# Altium PCB DCDC_IBB_-12V_V01.PcbDoc
Units mil, origin at the board's own origin, x right, y up, seen from the top; angles counter-clockwise.
Board outline 2539.37 x 1535.83 mil, 2 copper layers (Top Layer, Bottom Layer), stack 61.855 mil thick; 31 components, 13 nets, 73 pads, 48 vias.
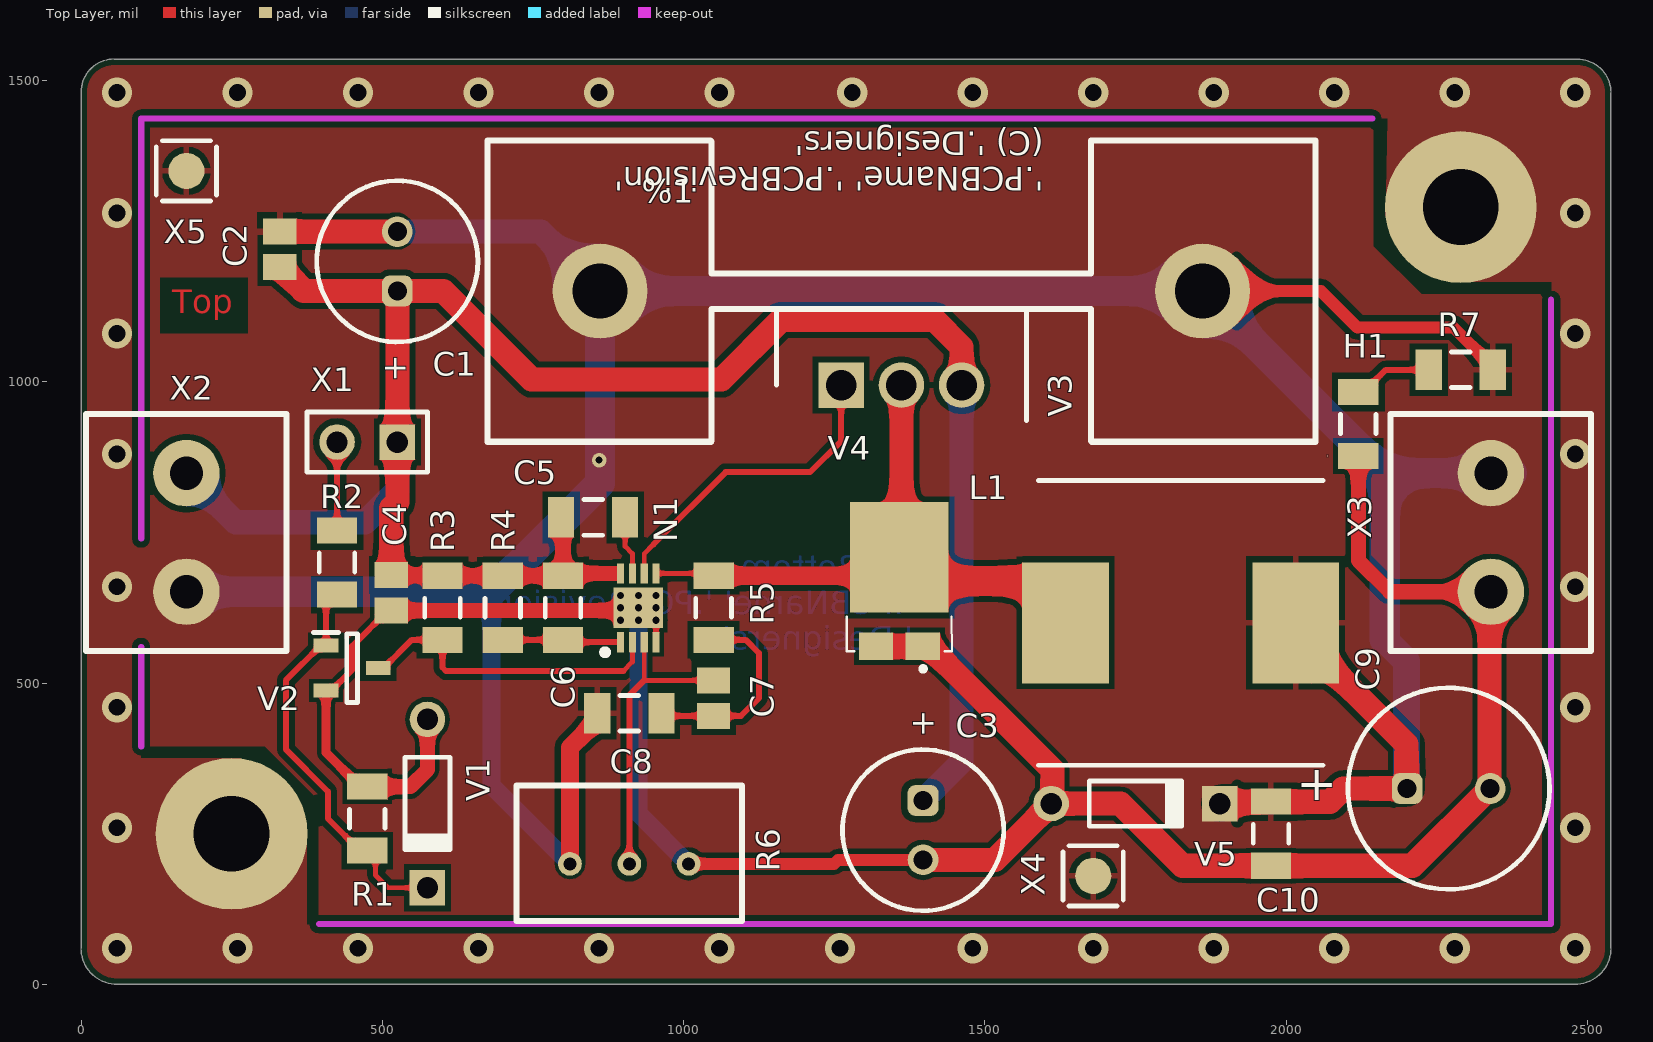
[diagram p0: Top Layer view]
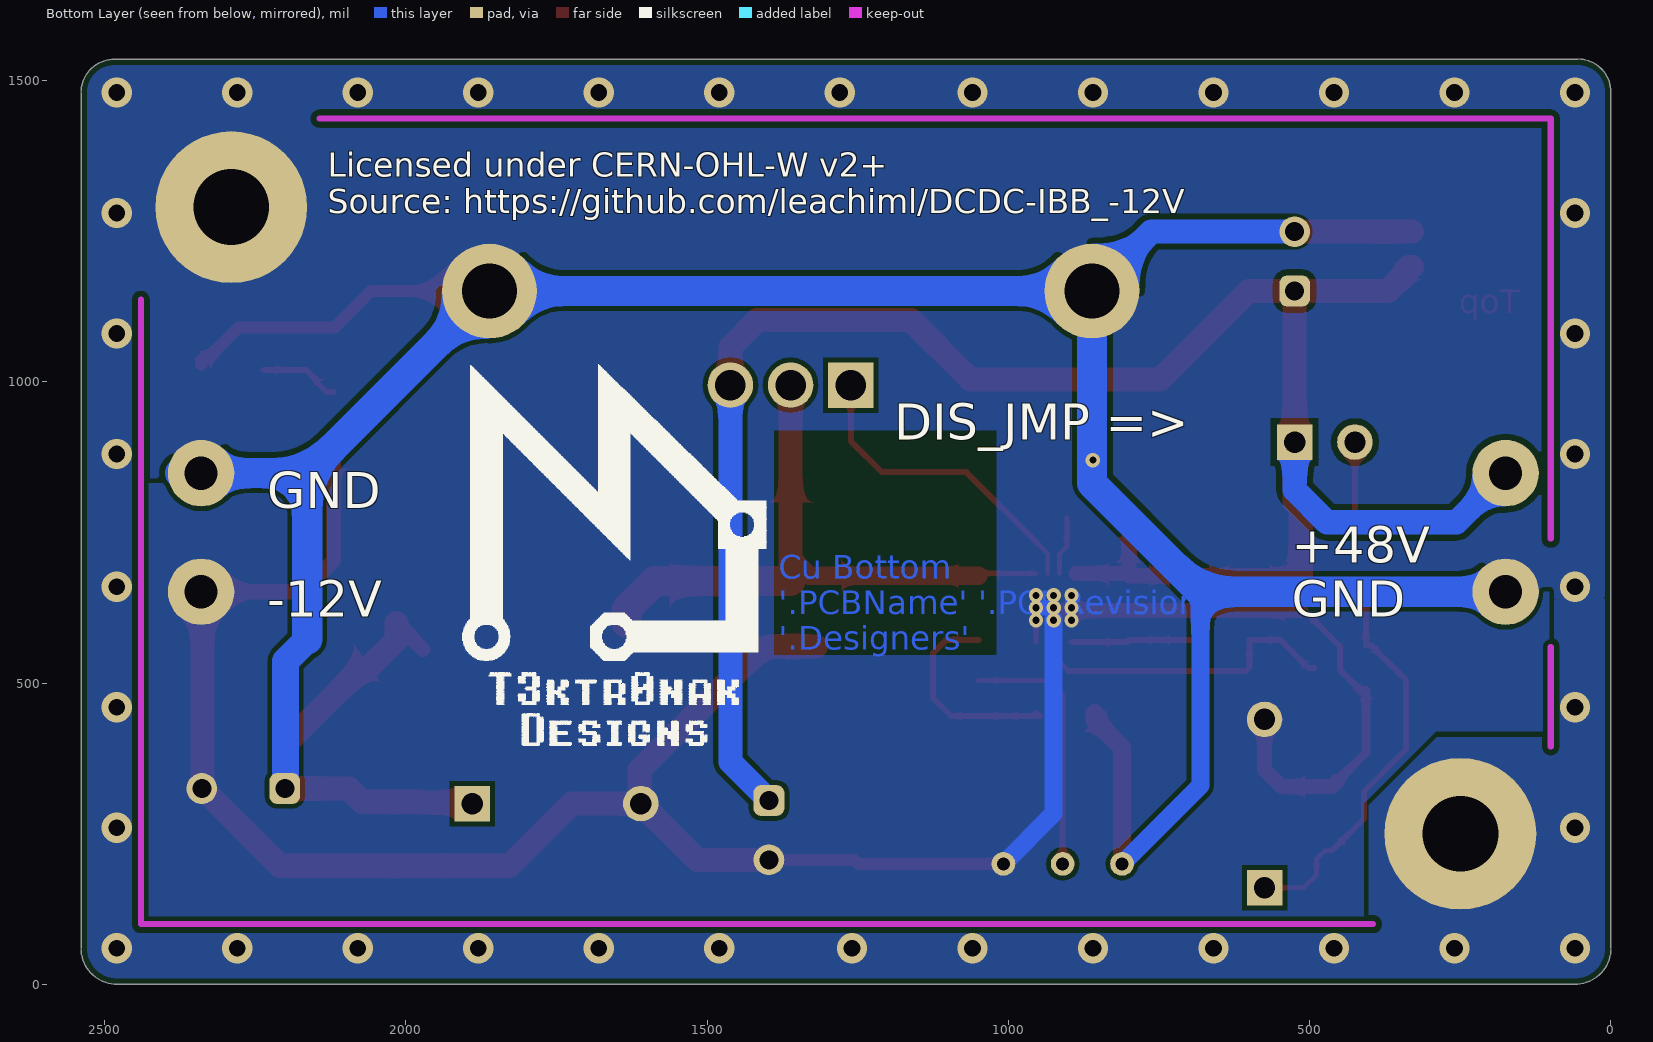
[diagram p1: Bottom Layer view, seen from below]

## Layer stack, top to bottom
Top Solder: solder mask 0.4, Solder Resist, Dk 3.5
Top Layer: signal copper 1.4
Dielectric 1: dielectric 59.0551, FR-4, Dk 4.8
Bottom Layer: signal copper 1.4
Bottom Solder: solder mask 0.4, Solder Resist, Dk 3.5

## Board outline
0,60 0,1481 0.17,1481 cw(c55,1481) 55,1535.83 55,1535.43 2483.94,1535.43 cw(c2483.94,1480) 2539.37,1480 2539.37,60 cw(c2479.37,60) 2479.37,0 60,0 cw(c60,60)

## Design rules (kind name [scope] priority, off if disabled: settings)
AcuteAngle [All] p1: minimum=4.40000000000000E+0001 checktracksonly=FALSE
BoardOutlineClearance [NOT(OnLayer('Top Overlay'))] p1: gap=10 ignorepadtopadclearanceinfootprint=FALSE
Clearance Clearance_-12V [(HasFootprint('SON50P300X300X80-9N') OR InNet('minus_12V'))] p1: gap=7.8 ignorepadtopadclearanceinfootprint=TRUE
Clearance [All] p2: gap=10 ignorepadtopadclearanceinfootprint=TRUE
HoleSize [All] p1: absolutevalues=TRUE maxlimit=248.03 minlimit=11.81 maxpercent=80.000 minpercent=20.000
HoleToHoleClearance HoleToHoleClearance_Thermal [HasFootprint('SON50P300X300X80-9N')] p1: gap=7 allowstackedmicrovias=TRUE
HoleToHoleClearance [All] p2: gap=10 allowstackedmicrovias=TRUE
MinimumAnnularRing [IsVia] p1: minimumring=5.9
MinimumSolderMaskSliver MinimumSolderMaskSliver_C1206 [(HasFootprint('C1206') OR HasFootprint('C0805') OR HasFootprint('1206_Marked'))] p1: minsoldermaskwidth=7
MinimumSolderMaskSliver MinimumSolderMaskSliver_N1 [HasFootprint('SON50P300X300X80-9N')] p2: minsoldermaskwidth=2.6
MinimumSolderMaskSliver MinimumSolderMaskSliver_Default [All] p3: minsoldermaskwidth=10
PlaneClearance [All] p1: clearance=59.06
PolygonConnect PolygonConnect_PowerNet [InNetClass('Power')] p1: thpad.connectstyle=Direct thpad.reliefconductorwidth=10 thpad.reliefentries=4 thpad.polygonreliefangle="90 Angle" thpad.airgapwidth=10 smdpad.connectstyle=Relief smdpad.reliefconductorwidth=10 smdpad.reliefentries=4 smdpad.polygonreliefangle="90 Angle" smdpad.airgapwidth=10 via.connectstyle=Direct via.reliefconductorwidth=10 via.reliefentries=4 via.polygonreliefangle="90 Angle" via.airgapwidth=10
PolygonConnect PolygonConnect_Default [All] p2: connectstyle=Relief reliefconductorwidth=10 reliefentries=4 polygonreliefangle="90 Angle" airgapwidth=10
RoomDefinition Topsheet [InComponentClass('Topsheet')] p1: confinementstyle=ConfineIn formatcopy=TRUE lockcomponents=FALSE outline 0,0 2540,0 2540,1534.8 0,1534.8
RoutingVias RoutingVias_Thermal [InNet('minus_12V')] p1: holewidth=39.37 width=70.87 viastyle="Through Hole" minholewidth=11.81 minwidth=23.62 maxholewidth=248.03 maxwidth=496.06
RoutingVias [All] p2: holewidth=28 width=50 viastyle="Through Hole" minholewidth=28 minwidth=50 maxholewidth=28 maxwidth=50
SilkToSolderMaskClearance [HasFootprint('SON50P300X300X80-9N')] p1: minsilkscreentomaskgap=9.7 clearancetoexposedcopper=TRUE
SilkToSolderMaskClearance SilkToSolderMaskClearance_Diode [HasFootprint('FSV1045V')] p2: minsilkscreentomaskgap=1 clearancetoexposedcopper=TRUE
SilkToSolderMaskClearance SilkToSolderMaskClearance_SOT [HasFootprint('SOT95P230X110-3N')] p3: minsilkscreentomaskgap=1 clearancetoexposedcopper=TRUE
SilkToSolderMaskClearance SilkToSolderMaskClearance_Default [IsPad] p4: minsilkscreentomaskgap=10 clearancetoexposedcopper=TRUE
SolderMaskExpansion [All] p1: expansion=4 istentingtop=FALSE
UnRoutedNet [All] p1: checkbadconnections=TRUE
Width Width_Power [InNetClass('Power')] p1: maxlimit=50 minlimit=5 preferedwidth=35 minimp=50.000000 maximp=50.000000 favimp=50.000000
Width Width_Default [All] p2: maxlimit=10 minlimit=8 preferedwidth=10 minimp=50.000000 maximp=50.000000 favimp=50.000000
24 further rules are at their usual default settings.

## Classes and differential pairs
net class Power: 48V GND minus_12V SW

## Components (designator, comment, footprint, x,y, rotation, side; value= is the part's Value field where it differs from the comment)
%1 "Kühlkörper für TO-220" "SK 104/25,4 STS" 1861.61,1150.59 r180 top
C1 "47uF" WCAP-ATG5_D6.3H11 525,1200 r270 top
C2 "0.1uF" C0805 330,1220 r270 top
C3 "47uF" WCAP-ATG5_D6.3H11 1397.64,255.91 r90 top
C4 "0.1uF" C0805 515,650 r90 top
C5 "470nF" C1206 850,775 r180 top
C6 "1000pF" C1206 800,625 r270 top
C7 "0.1uF" C0805 1050,475 r270 top
C8 "3300pF" C1206 910,450 r180 top
C9 "470uF" WCAP-ATG5_D8H11.5 2270,325 r180 top
C10 "1uF" C1206 1975,250 r90 top
H1 "LED Grün" 1206_Marked 2120,930 r90 top
L1 "100uH" INDPM120120X1020N 1825,600 r0 top
N1 "LM5085SD_NOPB" SON50P300X300X80-9N 925,625 r90 top
R1 "56k" C1206 475,275 r270 top
R2 "56k" C1206 425,700 r90 top
R3 "240k" C1206 600,625 r90 top
R4 "1.8k" C1206 700,625 r270 top
R5 "270k" C1206 1050,625 r90 top
R6 "10k" 64W-2,0M 910,200 r180 top
R7 "560" C1206 2290,1020 r0 top
V1 "1N751A" DO-35 575,300 r270 top
V2 "BSS123,215" SOT95P230X110-3N 450,525 r0 top
V3 "IRF9530N" TO254P469X1042X1967-3P 1261.61,994.59 r0 top
V4 "FSV12100V" FSV1045V 1358.27,708.66 r270 top
V5 "1N4148" DO-35 1750,300 r0 top
X1 "Stiftleiste 2-Pol" HDR1X2 525,900 r180 top
X2 "Lötbare Schraubklemme - 2-pol" "TERMINAL BLOCK 2POL RM5MM" 175,750 r270 top
X3 "Lötbare Schraubklemme - 2-pol" "TERMINAL BLOCK 2POL RM5MM" 2340,750 r90 top
X4 "FiducialSMD" PIN1RoundSMD 1680,180 r0 top locked
X5 "FiducialSMD" PIN1RoundSMD 175,1350 r0 top

## Footprints (in the part's own frame and the unit in brackets; to place one, negate y for a bottom-side part, rotate by r counter-clockwise, add the part's x,y. Pads: shape width x height; smd on the part's side, far side on the other; paste and mask are expansions set on the pad)
64W-2,0M [mm] "64W-2,0M Präzisionspotentiometer, 25 Gänge, stehend, 2,0 MOhm"
  round 1 hole 0.55: 1(-2.5,0) 2(0,0) 3(2.5,0)
  silkscreen extent -4.75,-3.3 4.75,2.4, body extent -4.75,-3.3 4.75,2.41, height 12
1206_Marked [mm] "Diode, Body 3.2x1.6mm, IPC High Density"
  rect 1.1x1.7 smd: 1(-1.35,0) 2(1.35,0)
  silkscreen extent -0.4,-0.75 0.4,0.75, body extent -1.7,-0.9 1.7,0.9, height 1.3
C0805 [mm] "Chip Capacitor, Body 2.0x1.3mm, IPC High Density"
  rect 1.1x1.4 smd: 1(-0.75,0) 2(0.75,0)
  body extent -1.1,-0.72 1.1,0.72, height 1.4
C1206 [mm] "Chip Capacitor, Body 3.2x1.6mm, IPC High Density"
  rect 1.1x1.7 smd: 1(-1.35,0) 2(1.35,0)
  silkscreen extent -0.4,-0.75 0.4,0.75, body extent -1.7,-0.9 1.7,0.9, height 1.3
DO-35 [mm] "Diode, Axial; Body 3.8 x 1.9 mm (LxDia. max), Lead Dia. 0.53 mm (max)"
  round 1.5 hole 0.9: 1(-3.55,0)
  rect 1.5x1.5 hole 0.9: 2(3.55,0)
  silkscreen extent -1.95,-0.95 2.05,0.95
FSV1045V [mm]
  rect 1.15x1.45 smd: 1(3.75,-0.985) 1(3.75,0.985)
  rect 4.65x4.15 smd: 3(0,0)
  silkscreen extent 2.5,-2.22 4.8,2.22, body extent -1.95,-2.22 4.21,2.22, height 1.3
HDR1X2 [mm] "Connector; Header; 2 Position"
  rect 1.5x1.5 hole 0.9: 1(0,0)
  round 1.5 hole 0.9: 2(2.54,0)
  silkscreen extent -1.27,-1.27 3.81,1.27
INDPM120120X1020N [mm]
  rect 3.65x5.1 smd: 1(-4.85,0) 2(4.85,0)
  silkscreen extent -6,-6 6,6, body extent -6.15,-6.15 6.15,6.15, height 10.16
PIN1RoundSMD [mil] "Connector; PlugRoundSMD"
  round 60 smd: 1(0,0)
  silkscreen extent -50,-50 50,50
"SK 104/25,4 STS" [mm] "Kühlkörper 14K/W TO-220"
  round 4 hole 2.32: 1(0,0) 1(25.4,0)
  silkscreen extent -4.75,-6.35 30.15,6.35, body extent -4.72,-6.32 30.17,6.38, height 25.4
SON50P300X300X80-9N [mm]
  rect 0.85x0.3 smd: 1(-1.45,0.75) 2(-1.45,0.25) 3(-1.45,-0.25) 4(-1.45,-0.75) 5(1.45,-0.75) 6(1.45,-0.25) 7(1.45,0.25) 8(1.45,0.75)
  rect 1.7x2.1 smd: 9(0,0)
  silkscreen extent -2,1.27 -1.75,1.52, body extent -1.55,-1.5 1.55,1.5, height 0.8
SOT95P230X110-3N [mm]
  rect 1.05x0.6 smd: 1(-1.1,0.95) 2(-1.1,-0.95) 3(1.1,0)
  silkscreen extent -1.63,-1.45 0.23,1.5, body extent -1.15,-1.45 1.15,1.45, height 1.1
"TERMINAL BLOCK 2POL RM5MM" [mm] "Terminal Block 2Pol RM5mm"
  round 2.8 hole 1.4: 1(-2.5,0) 2(2.5,0)
  silkscreen extent -5,-4.23 5,4.23, body extent -5,-4.03 5.55,4.13, height 9.99
TO254P469X1042X1967-3P [mm]
  rect 1.92x1.92 hole 1.28: 1(0,0)
  round 1.92 hole 1.28: 2(2.54,0) 3(5.08,0)
  silkscreen extent -2.73,-1.5 7.81,3.19, body extent -2.67,-1.5 7.75,3.19, height 18.84
WCAP-ATG5_D6.3H11 [mm] "Aluminum Electrolytic Capacitors, 6.3x11mm"
  rrect50% 1.3x1.3 hole 0.8: 1(1.25,0)
  round 1.3 hole 0.8: 2(-1.25,0)
  silkscreen extent -3.4,-3.4 3.4,3.4, body extent -3.14,-3.15 3.15,3.15, height 11.31
WCAP-ATG5_D8H11.5 [mm] "Aluminum Electrolytic Capacitors, 8x11.5mm"
  rrect50% 1.3x1.3 hole 0.8: 1(1.75,0)
  round 1.3 hole 0.8: 2(-1.75,0)
  silkscreen extent -4.25,-4.25 4.25,4.25, body extent -3.99,-4 4,4, height 11.81

## Part data
%1: library part Placeholder, "Mechanische Komponenten Platzhalter", Manufacturer="Fischer Elektronik", Bezeichnung="Kühlkörper für TO-220", Orderingcode="SK 104/25,4 STS"
C1 C3: library part 860020773013, "=Bezeichnung", Capacitance Tolerance=+/-20%, Leakage Current=29.61uA, Manufacturer="Wurth Elektronik", Operating Temperature="-40 to +105degC", Rated Voltage=63VDC, Ripple Current=125mA, Bezeichnung="WCAP-ATG5 Aluminum Electrolytic Capacitor, Radial, THT, D6.3xH11, 47uF, 63V", Capacitance=47uF, ComponentLink1Description=Manufacturer, ComponentLink1URL=http://www.we-online.de, ComponentLink2Description=Datasheet, ComponentLink2URL=https://www.we-online.com/catalog/datasheet/860020773013.pdf, Diameter=6.3mm, Dissipation Factor=9%, Endurance=2000h, Height=11mm, Mounting Technology=THT, Orderingcode=860020773013, Packaging="Ammo Pack", Published Date="October 2020", Technical Reference=ATDD110470M063DSPA4B000
C2 C4 C5 C6 C7 C8 C10: library part "Cap Semi", "Capacitor (Semiconductor SIM Model)", Manufacturer=KEMET, LatestRevisionDate=29-May-2009, LatestRevisionNote="IPC-7351 Footprint Added.", PackageDescription="Chip Capacitor", PackageReference=C1206, Published=8-Jun-2000, Publisher="Altium Limited"
  C2 C4 C7: Bezeichnung="Kerko 63V", Orderingcode=C0805C104KMREC7210
  C5: Bezeichnung="Kerko 16V", Orderingcode=C1206C474KMREC7210
  C6: Bezeichnung="Kerko 63V", Orderingcode=C1206C102KMRECTU
  C8: Bezeichnung="Kerko 63V", Orderingcode=C1206C332K1RAC7553
  C10: Bezeichnung="Kerko 63V", Orderingcode=C1206C105K5RACTU
C9: library part 860020374012, "=Bezeichnung", Capacitance Tolerance=+/-20%, Leakage Current=75.2uA, Manufacturer="Wurth Elektronik", Operating Temperature="-40 to +105degC", Rated Voltage=16VDC, Ripple Current=370mA, Bezeichnung="WCAP-ATG5 Aluminum Electrolytic Capacitor, Radial, THT, D8xH11.5, 470uF, 16V", Capacitance=470uF, ComponentLink1Description=Manufacturer, ComponentLink1URL=http://www.we-online.de, ComponentLink2Description=Datasheet, ComponentLink2URL=https://www.we-online.com/catalog/datasheet/860020374012.pdf, Diameter=8mm, Dissipation Factor=15%, Endurance=2000h, Height=11.5mm, Mounting Technology=THT, Orderingcode=860020374012, Packaging="Ammo Pack", Published Date="October 2020", Technical Reference=ATDE115471M016DSPA7B000
H1: library part "LED 5mm, 2.54mm Rastermaß, 0.5mm", "LED 5mm, 2.54mm Rastermaß, 0.5mm Beinchendurchmesser", Manufacturer="Stanley Electric", Bezeichnung="LED 20mA 1206 Grün", Orderingcode=RPG1102W-660-TR
L1: library part Inductor, "Inductor", Manufacturer=Coilcraft, Bezeichnung="Spule 100uH; 3.4A; MSS1210-104KED", Code_IEC=1005, Code_JEITA=0402, LatestRevisionDate=29-May-2009, LatestRevisionNote="IPC-7351 Footprint Added.", Orderingcode=MSS1210-104KED, PackageDescription="Chip Inductor", PackageReference=0402-A, Published=8-Jun-2000, Publisher="Altium Limited"
N1: "Integrated Circuit", Arrow Part Number=LM5085SD/NOPB, Manufacturer="Texas Instruments", Mouser Part Number=926-LM5085SD/NOPB, Arrow Price/Stock=https://www.arrow.com/en/products/lm5085sdnopb/texas-instruments, Datasheet Link=http://www.ti.com/lit/gpn/lm5085, Height=0.8mm, Mouser Price/Stock=https://www.mouser.co.uk/ProductDetail/Texas-Instruments/LM5085SD-NOPB?qs=QbsRYf82W3Ha5v5j3YN%2FqQ%3D%3D, Orderingcode=LM5085SD/NOPB
R1 R2 R3 R4 R5 R7: library part Res2, "Resistor", LatestRevisionDate=17-Jul-2002, LatestRevisionNote="Re-released for DXP Platform.", PackageDescription="Axial Device, Thru-Hole; 2 Leads; 0.4 in Pin Spacing", PackageReference=AXIAL-0.4, Published=8-Jun-2000, Publisher="Altium Limited"
R6: library part 64W-2,0M, "64W-10K Präzisionspotentiometer, 25 Gänge, stehend, 10k Ohm", Manufacturer=Suntan, Bezeichnung="64W-10K Präzisionspotentiometer, 25 Gänge, stehend, 10k Ohm"
V1: library part "Diode 1N4148", "=Bezeichnung", Bezeichnung="Zener Diode 5,1V", Code_JEDEC=DO-204-AH, ComponentLink1Description="Manufacturer Link", ComponentLink1URL=http://www.fairchildsemi.com/, ComponentLink2Description=Datasheet, ComponentLink2URL=http://www.fairchildsemi.com/ds/1N%2F1N4148.pdf, DatasheetVersion=1997, LatestRevisionDate=17-Jul-2002, LatestRevisionNote="Re-released for DXP Platform.", PackageDescription="Diode, Axial; Body 3.8 x 1.9 mm (LxDia. max), Lead Dia. 0.53 mm (max)", PackageReference=DO-35, Published=8-Jun-2000, Publisher="Altium Limited"
V2: "MOSFET (N-Channel)", Manufacturer=Nexperia, Mouser Part Number=771-BSS123-T/R, Arrow Part Number=BSS123,215, Arrow Price/Stock=https://www.arrow.com/en/products/bss123215/nexperia, Datasheet Link=https://componentsearchengine.com/Datasheets/2/BSS123,215.pdf, Height=1.1mm, Mouser Price/Stock=https://www.mouser.co.uk/ProductDetail/Nexperia/BSS123215?qs=me8TqzrmIYWQISbOHJHs9Q%3D%3D, Orderingcode=BSS123,215
V3: "MOSFET (P-Channel)", Manufacturer="International Rectifier", Bezeichnung="Mosfet P-Channel Enhancement 100V", Datasheet Link=https://www.infineon.com/dgdl/irf9530n.pdf?fileId=5546d462533600a401535611b4a71dbf, Height=4.69mm, Orderingcode=IRF9530N
V4: library part "Diode 10TQ035", "Schottky Rectifier", Bezeichnung="Shotky Diode", ComponentLink1Description="Manufacturer Link", ComponentLink1URL=http://www.irf.com/, ComponentLink2Description=Datasheet, ComponentLink2URL=http://www.irf.com/product-info/datasheets/data/10tq.pdf, DatasheetVersion=PD-2.057B, LatestRevisionDate=17-Jul-2002, LatestRevisionNote="Re-released for DXP Platform.", Note="Terminal 2 is the TAB and is electrically connected to the cathode", PackageDescription="TO, Thru-Hole, Vertical, Heatsink Mounted; 3 In-Line Leads (1 Absent); Pitch 2.54 mm", PackageReference=TO-220AC, PackageVersion=Feb-1998, Published=8-Jun-2000, Publisher="Altium Limited"
V5: library part "Diode 1N4148", "High Conductance Fast Diode", Bezeichnung="Kleinleistungs Diode", Code_JEDEC=DO-204-AH, ComponentLink1Description="Manufacturer Link", ComponentLink1URL=http://www.fairchildsemi.com/, ComponentLink2Description=Datasheet, ComponentLink2URL=http://www.fairchildsemi.com/ds/1N%2F1N4148.pdf, DatasheetVersion=1997, LatestRevisionDate=17-Jul-2002, LatestRevisionNote="Re-released for DXP Platform.", Orderingcode=1N4148, PackageDescription="Diode, Axial; Body 3.8 x 1.9 mm (LxDia. max), Lead Dia. 0.53 mm (max)", PackageReference=DO-35, Published=8-Jun-2000, Publisher="Altium Limited"
X1: library part "Header 2", "Header, 2-Pin", Bezeichnung="Stiftleiste RM2,54", LatestRevisionDate=17-Jul-2002, LatestRevisionNote="Re-released for DXP Platform.", Publisher="Altium Limited"
X2 X3: library part "Terminal-Block 2Pol. RM5mm", Manufacturer=RND, Bezeichnung="Lötbare Schraubklemme - 2-pol, RM 5 mm, 90°", Orderingcode="RND 205-00045"
X4 X5: library part PlugRoundSMD, "PlugRoundSMD", LatestRevisionDate=17-Jul-2002, LatestRevisionNote="Re-released for DXP Platform.", Publisher="Altium Limited"

## Free pads (board coordinates)
  round 251.97 hole 125.98: 1(250,250) 1(2290,1290)

## Via types
v1: diameter 50, hole 28, Top Layer to Bottom Layer, 38 vias
v2: diameter 23.62, hole 11.81, Top Layer to Bottom Layer, 10 vias

## Nets (pads, with @x,y where several pads share a name; then routed paths per layer and width w, separated by ;. In a path a pad name is that pad's centre, name@x,y a point inside that pad or via, vN(x,y) a via of type N, cw(c..) or ccw(c..) an arc to the next point about the centre after c; other vN are vias at no path point)
48V: C1.1 C2.2 C3.1 C4.2 C5.2 C6.1 N1.8 R3.2 R4.1 V3.3 X1.1 X2.1 | length 3500.3
  Top Layer w5: 888,682.09 N1.8
  Top Layer w10: R3.2@599.31,678.84 R3.2
  Top Layer w25: C4.2 519.88,679.53 C4.2@529.04,688.68 ; C4.2@525,678.84 R3.2@599.31,678.84 ; R3.2 R4.1 C6.1 ; C5.2 800,771.85 C6.1 ; 888,682.09 803.94,682.09 C6.1
  Top Layer w40: C2.2 335.91,1190.47 337.56,1188.82 337.56,1182.91 369.69,1150.79 C1.1 ; C4.2 515,790.59 525,800.59 X1.1 C1.1 ; V3.3 1461.61,1058.07 1417.32,1102.36 1161.42,1102.36 1062.99,1003.94 748.03,1003.94 601.18,1150.79 C1.1
  Bottom Layer w40: X2.1 256.5,766.93 471.65,766.93 525,820.28 X1.1 ; C3.1 1461.61,369.09 V3.3
FB: C7.1 N1.3 R6.2 | length 493.4
  Top Layer w8: 934.53,504.53 C7.1 ; 934.84,504.68 N1.3
  Top Layer w10: R6.2 910,480 934.53,504.53
GND: %1.1 C1.2 C2.1 C8.2 C9.1 C10.2 L1.2 pad.1 R6.3 R7.2 V5.2 X2.2 X3.2 X4.1 X5.1 | length 5880.3
  Top Layer w20: %1.1@1861.61,1150.59 2058.07,1150.59 2118.66,1090 2278.27,1090 2324.8,1043.46 2331.5,1043.46 2339.8,1035.16 R7.2@2339.8,1028.46
  Top Layer w25: L1.2@1971.85,555.91 L1.2
  Top Layer w30: R6.3 811.57,392.91 856.85,438.19 C8.2
  Top Layer w40: C2.1 330.32,1249.21 C1.2 C1.2@522.86,1251.35 ; V5.2 1891.34,301.57 1973.43,301.57 C10.2 2073.15,303.15 2095,325 2200,325 2200,398.43 2078.82,519.61 2067.8,519.61 2015.94,571.46 L1.2
  Bottom Layer w30: 681.57,651.57 681.57,330 R6.3
  Bottom Layer w40: C1.2 762.99,1249.21 %1.1@861.61,1150.59
  Bottom Layer w45: 2163.78,572.44 2200,536.22 C9.1@2200,325
  Bottom Layer w50: X2.2 681.57,651.57 861.61,831.61 861.61,870 861.61,1150.59 1861.61,1150.59 2163.78,848.43 ; 2163.78,572.44 2163.78,848.43 ; X3.2@2375,848.43 X3.2 2163.78,848.43
  other v1: 60,60 260,60 460,60 660,60 860,60 1060,60 1260,60 1480,60 1680,60 1880,60 2080,60 2280,60 2480,60 60,260 2480,260 60,460 2480,460 60,660 2480,660 60,880 2480,880 60,1080 2480,1080 60,1280 2480,1280 60,1480 260,1480 460,1480 660,1480 860,1480 1060,1480 1280,1480 1480,1480 1680,1480 1880,1480 2080,1480 2280,1480 2480,1480
  other v2: 860,870
minus_12V: C3.2 C4.1 C9.2 C10.1 H1.1 N1.4 N1.9 R1.1 R6.1 V1.1 V2.2 V4.1 V5.1 X3.1 | length 4127.2
  Top Layer w8: N1.4 v2(954.53,604.33)
  Top Layer w10: V2.2@415.55,487.6 450,522.05 450,561.38 509.09,620.47 C4.1
  Top Layer w15: V2.2@415.55,487.6 V2.2 406.69,384.65 R1.1@454.04,337.3
  Top Layer w20: R6.1 1250,200 1256.69,206.69 C3.2
  Top Layer w25: R1.1@454.04,337.3 463.19,328.15 R1.1 546.85,328.15 575,356.3 V1.1 ; C4.1 N1.9@920.47,620.47 ; H1.1 2120,703.66 2172.09,651.57 X3.1
  Top Layer w40: V4.1@1319.49,561.02 1397.05,561.02 1399.68,558.39 1410.12,558.39 1612.2,356.3 1612.2,300 1725,300 1828.15,196.85 C10.1 2209.65,196.85 2337.8,325 2337.8,649.37 X3.1 ; C3.2 1516.93,206.69 V5.1
  Bottom Layer w25: v2(925,625) v2(954.53,625)
  Bottom Layer w30: v2(925,604.33) 925,283.43 R6.1
  other v2: 895.47,604.33 895.47,625 895.47,645.67 925,645.67 954.53,645.67
NetC5_1: C5.1 N1.7 | length 97.9
  Top Layer w8: C5.1 903.15,726.85 915.16,714.84 N1.7
NetC6_2: C6.2 N1.1 R4.2 | length 197.1
  Top Layer w10: R4.2 C6.2 803.94,567.91 N1.1
NetC7_2: C7.2 C8.1 R5.1 | length 431.9
  Top Layer w10: C8.1@947.68,445.47 C7.2@1040,445.47 ; C8.1@953.15,450 C8.1@957.68,445.47 ; C8.1@963.15,445.47 C7.2 1095.47,445.47 1125,475 1125,550 1103.15,571.85 R5.1
NetH1_A: H1.2 R7.1 | length 133.9
  Top Layer w10: H1.2 2131.81,983.15 2148.46,999.8 2148.46,1002.88 2165.58,1020 R7.1
NetN1_2: N1.2 R3.1 V2.3 | length 528.7
  Top Layer w8: 900,520 915.16,535.16 N1.2
  Top Layer w10: V2.3 502.17,525 549.02,571.85 R3.1 600,525.86 605.86,520 900,520
NetN1_6: N1.6 V3.1 | length 529.9
  Top Layer w8: N1.6 934.84,714.84 950,730
  Top Layer w10: 950,730 1070,850 1210,850 1261.61,901.61 V3.1
NetR1_2: R1.2 R2.1 V1.2 V2.1 | length 669.9
  Top Layer w8: R2.1@406.69,629.2 424.35,646.85 R2.1 ; R1.2@463.19,221.85 R1.2 488.77,208.08 488.77,181.23 509.76,160.24 V1.2
  Top Layer w10: R2.1@406.69,629.2 V2.1 397.83,562.4 340,504.57 340,490 340,390 410,320 410,275.04 R1.2@463.19,221.85
NetR2_2: R2.2 X1.2 | length 146.9
  Top Layer w10: R2.2 X1.2
SW: L1.1 N1.5 R5.2 V3.2 V4.3 | length 1060.9
  Top Layer w8: N1.5 R5.2@1046.06,682.09
  Top Layer w20: R5.2@1046.06,682.09 R5.2
  Top Layer w30: R5.2 1331.1,678.15 V4.3@1361.61,708.66
  Top Layer w40: V4.3@1361.61,669.29 1361.61,708.66 V3.2
  Top Layer w50: V4.3@1361.61,669.29 1587.2,669.29 1634.06,622.44 L1.1

## Polygon pours and split planes (outlines as drawn)
GND on Bottom Layer "GND_L02_P004" (solid, pour order 4): 404.71,100 404.71,295.29 290,410 100,410 100,650 90,640 0,640 0,0 2539.37,0 2539.37,839.37 2540,840 2440,840 2440,100
GND on Bottom Layer "GND_L02_P002" (solid, remove dead copper, pour order 2): 0,1535.43 2539.37,1535.43 2540,1534.8 2540,840 2170,840 1861.61,1148.39 1861.61,1150.59 861.61,1150.59 861.61,831.61 844.61,831.61 652.99,640 0,640
minus_12V on Bottom Layer "MINUS_12V_L02_P001" (solid, remove dead copper, pour order 1): 196.85,651.57 317.32,651.57 681.57,651.57 861.61,831.61 861.61,1150.59 1859.41,1150.59 2178.39,831.61 2437.28,831.61 2437.28,102.76 921.26,102.76 704.72,102.76 419.33,102.76 410,110 410,300.16 290.16,420 102.09,420 102.09,651.57
GND on Top Layer "GND_L01_P003" (solid, pour order 3): 2123.99,1437.01 2167.99,1437.01 2165,1275 2275,1165 2440,1165 2440,1121 2440,100 100,100 0,0 2539.37,0 2539.37,1535.43 0,1535.43 0,0 100,100 100,1437.01
GND on Top Layer "GND_L01_P007" (solid, pour order 7): 94.15,375 265,375 375,265 375,85.87 94.15,85.87
GND on Top Layer "GND_L01_P006" (solid, remove dead copper, pour order 6): 100,395 305,395 395,305 395,100 2440,100 2440,1145 2225,1145 2145,1225 2145,1437.01 100,1437.01
no net on Top Layer "NONET_L01_P005" (solid, pour order 5): 2140,1420
no net on Bottom Solder "NONET_L02_P-001" (solid): 2170,1410.18 2143.17,1437.01 2170,1437.01 2440,1437.01 2440,1140.18 2410.18,1170 2240,1170 2170,1240

## Keep-outs
Keep-Out Layer:
  lines w10: 100,395 100,560 ; 100,740 100,1437.01 2143.17,1437.01 ; 395,100 2440,100 2440,1136.29

## Other copper
Top Layer:
  text "Top" at 151.57,1113.51 h39.37
Bottom Layer:
  text "Cu Bottom / '.PCBName' '.PCBRevision' / '.Designers'" at 1381.05,555.12 h39.37

## Silkscreen, mask and mechanical layers (free items; w line width, h text height)
Top Overlay:
  text "'.PCBName' '.PCBRevision' / (C) '.Designers'" at 1597.83,1415 h39.37 r180
Bottom Overlay:
  drawing of 17 lines, arcs and shapes, not listed
  text "Licensed under CERN-OHL-W v2+  / Source: https://github.com/leachiml/DCDC-IBB_-12V" at 2130,1280 h40
  text "DIS_JMP =>" at 1189.8,903.86 h60
  text "+48V / GND" at 529.93,610 h60
  text "GND /  / -12V" at 2230,610 h60
Top Paste:
  text "Loetpaste Top '.PCBName' '.PCBRevision'" at 531.5,1673.23 h60
Bottom Paste:
  text "SMD Stencil Bottom '.PCBName' '.PCBRevision'" at 2165.35,1673.23 h60
Top Solder:
  region: 128,375 99.15,403.85 98.47,403.18 98.47,375 100,100 403,100 376.87,126.13 376.87,258.63 234.95,375
  region: 2170,1410.18 2140.38,1439.8 2102.8,1437.01 2127.56,1437.01 2130.36,1439.8 2440,1437.01 2440,1141.6 2439.29,1140.89 2440,1140.89 2439.29,1140.89 2439.64,1140.53 2410.18,1170 2250,1170 2170,1250
  region: 0,0 0,1535.43 0.32,1535.12 2539.68,1535.12 2539.68,0.32 2539.37,0 0,0 100,100 2440,100 2440,1437.01 100,1437.01 100,100
  text "Soldermask Top '.PCBName' '.PCBRevision'" at 492.13,1673.23 h60
Bottom Solder:
  rectangle: 879.92,588 971,661.42
  region: 128,375 99.15,403.85 94.15,398.85 94.15,375 94.15,85.87 376.87,85.87 404.13,85.87 403,87 403,100 376.87,126.13 376.87,278.13 280,375
  region: 0,0 100,100 2440,100 2440,1437.01 100,1437.01 100,100 0,0 0,1535.43 2539.37,1535.43 2539.37,0 0,0
  text "Soldermask Bottom '.PCBName' '.PCBRevision'" at 2145.67,1673.23 h60
Mechanical 1:
  lines w25: 0,1481 0,60 ccw(c60,60) 60,0 2480,0 ; 0.17,1481 cw(c55,1481) 55,1535.83 ; 55,1535.43 2485.17,1535.43 ; 2479.37,0 ccw(c2479.37,60) 2539.37,60 2539.37,1480 ccw(c2483.94,1480) 2483.94,1535.43
Dimensions:
  text "Drilling Plan '.PCBName' '.PCBRevision'" at 551.18,1673.23 h60
Mechanical 3:
  text "Placement plan '.PCBName' '.PCBRevision' / M '.Scaleing':1 '.Designers'" at 185.04,1673.23 h60
  text "(c) Copyright Michael Berger 2021 /  / This source describes Open Hardware and is licensed under the CERN-OHL-W v2+. /  / You may redistribute and modify this source and make products using it under the terms of the  / CERN-OHL-W v2 or any later version (https://ohwr.org/cern_ohl_w_v2.txt).          /                                                                                / This source is distributed WITHOUT ANY EXPRESS OR IMPLIED WARRANTY, INCLUDING OF MERCHANTABILITY, / SATISFACTORY QUALITY AND FITNESS FOR A PARTICULAR PURPOSE. / Please see the CERN-OHL-W v2 or any later version for applicable conditions.   /                                                                                / Source location: https://github.com/leachiml/DCDC-IBB_-12V /  / As per CERN-OHL-W v2 section 4, should You produce hardware based on this source,  / You must where practicable maintain the Source Location visible on the PCB of / the DCDC IBB or other products you make using this source." at -1000,-2045 h60
Drill Drawing:
  text "Drill Legend:" at 2631.73,1434.88 h60
  text ".LEGEND" at 2631.73,-415.12 h60
  text "Base material:" at 2631.73,-565.12 h60
  text "FR4" at 2731.73,-665.12 h60
  text "PCB technology:" at 2631.73,-815.12 h60
  text "1,5mm 35um 35um" at 2731.73,-915.12 h60
  text "double sided, plated throught" at 2731.73,-1015.12 h60
  text "ENIG" at 2731.73,-1115.12 h60
  text "Tolerances:" at 2631.73,-1315.12 h60
  text "PCB: +/- 0,15mm" at 2731.73,-1415.12 h60
  text "Contour: +0 - 0,3mm" at 2731.73,-1515.12 h60

## Dimensions
60,0 to 55,1535.43 on Dimensions
2539.37,60 to 0,60 on Dimensions

## Text inside footprints (layer, text, board x,y; h text height)
C1: Top Overlay "+" at 505,1045 h39.37 r270
C3: Top Overlay "+" at 1415,410 h39.37 r90
C9: Top Overlay "+" at 2085,355 h59.06 r180